# EAGLE board shema.v5 (EAGLE 7.6.0)
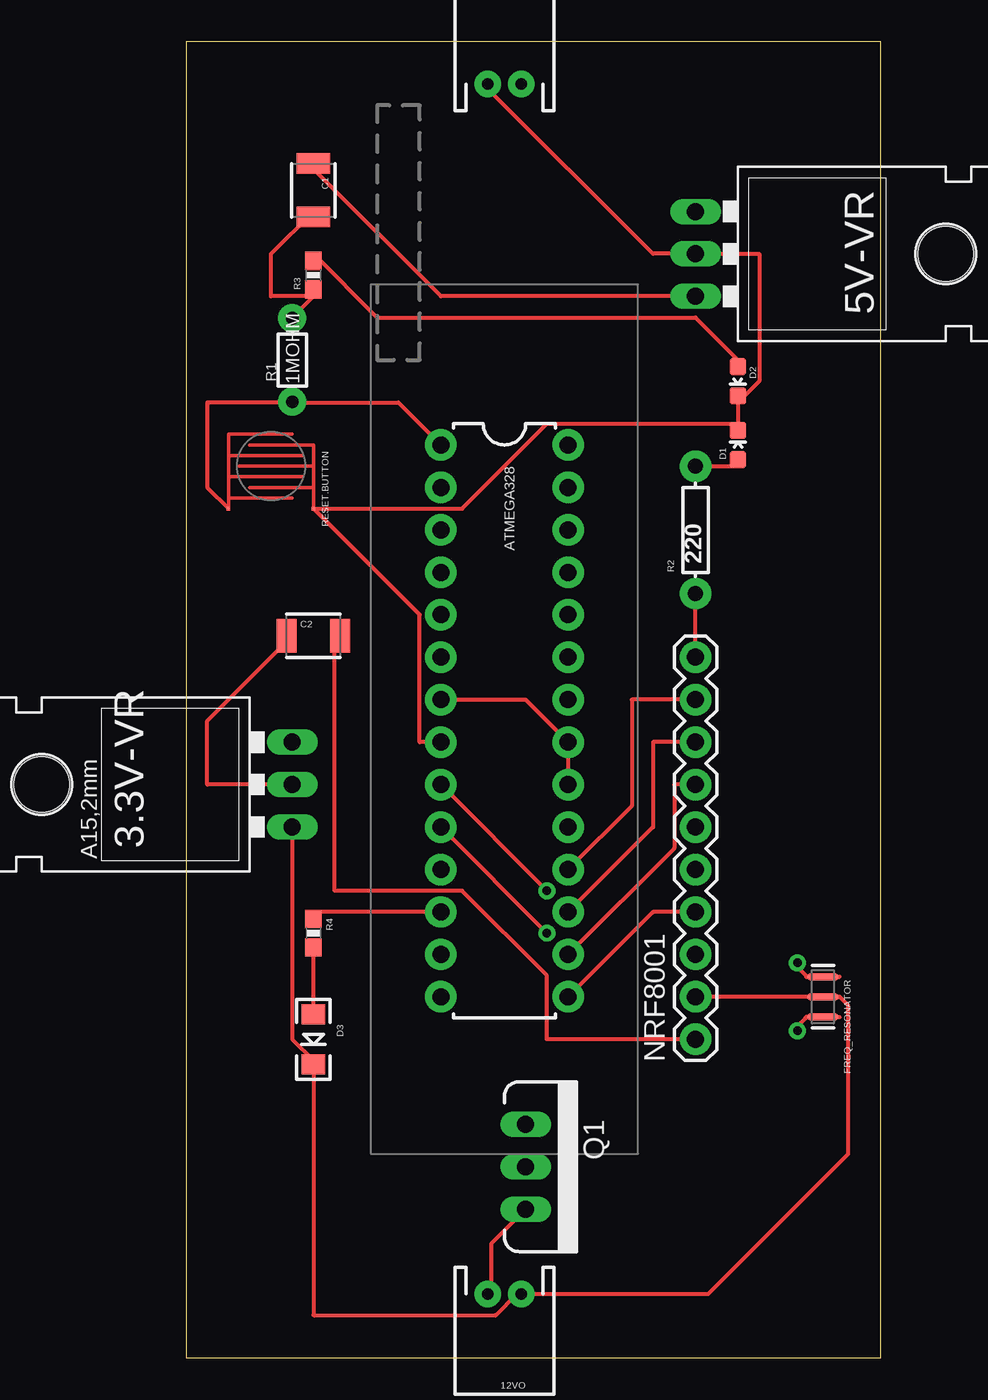
[diagram p0: board, top side]
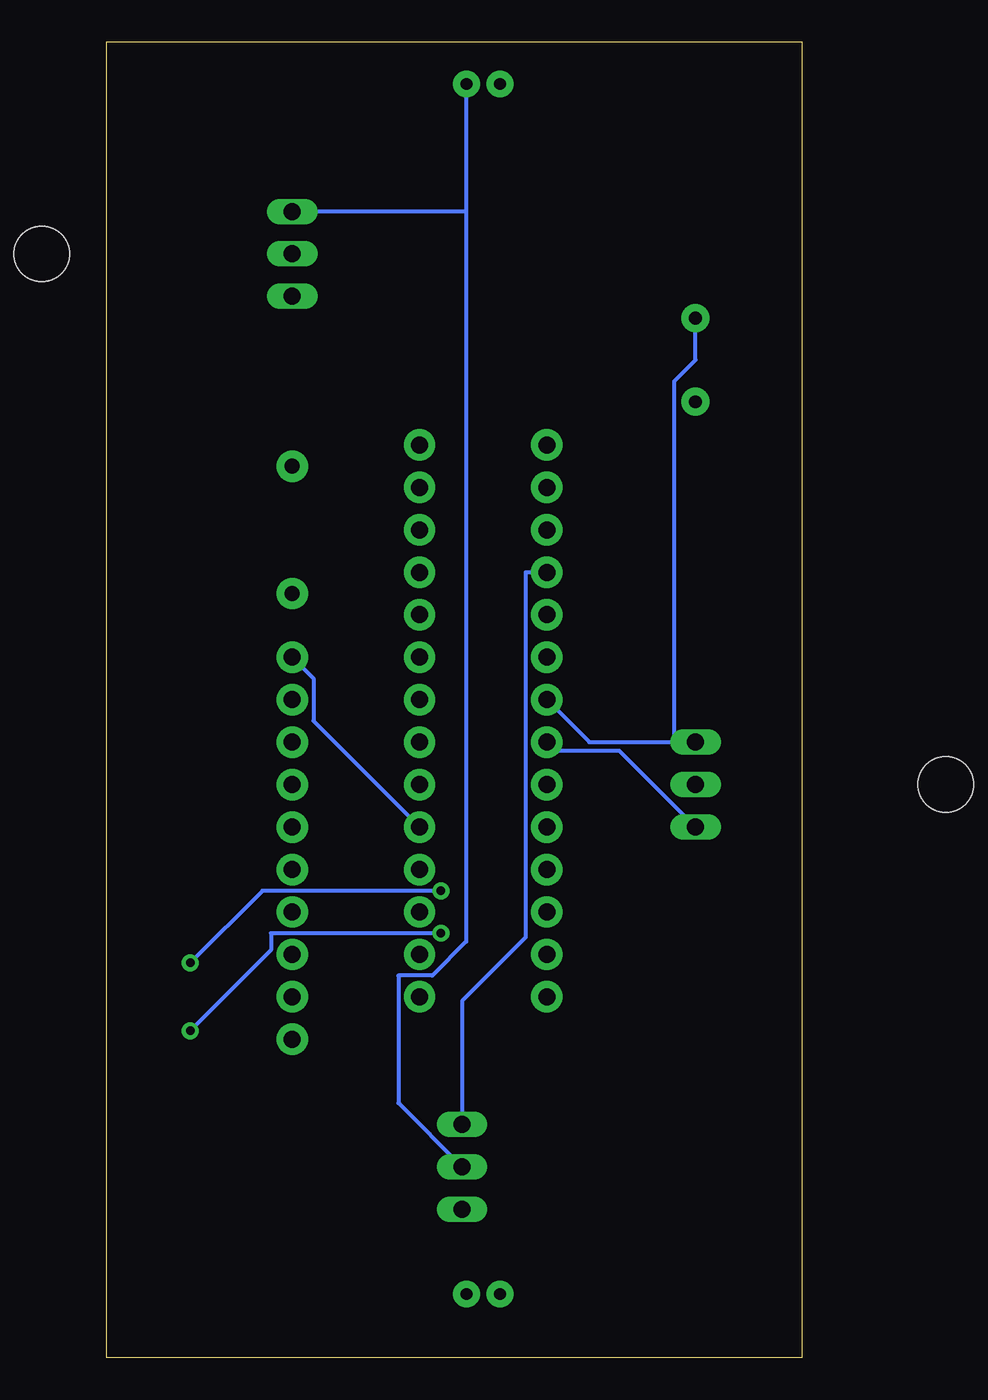
[diagram p1: board, bottom side, seen from below]

Size 41.58 x 78.73 mm. Coordinates in mm from the lower left corner, seen from the top.
Outline: 0,0 41.58,0 41.58,78.73 0,78.73 0,0
Copper layers (1*16): Top 0.035mm / dielectric 1.5mm / Bottom 0.035mm
Design rules "SparkFun-2-layer-STANDARD": minimum track width 10mil, minimum drill 20mil, track to track 10mil, track to pad 8mil, pad to pad 8mil, via to via 10mil, smd to smd 8mil, copper to edge 8mil, drill to drill 8mil, minimum pad ring 10mil, minimum via ring 10mil, stop-mask expansion 4mil, vias tented up to drill 25mil, thermal gap 10mil

## Footprints (pad centres in the part's own frame; a part is rotated, then mirrored left to right if it is on the bottom)
78XXL = drill 1.016 long: GND 0,-3.81; IN -2.54,-3.81; OUT 2.54,-3.81 | hole 3.302: 0,11.176
TO-220-ALT = drill 1.016 long: GND 0,-3.81; IN -2.54,-3.81; OUT 2.54,-3.81 | hole 3.302: 0,11.176
JST-2-PTH = drill 0.7 pad 1.6: 1 -1,0; 2 1,0
DIL28-3-ZIF_SOCKET = drill 1.016 pad 1.88: 1 -16.51,-3.81; 2 -13.97,-3.81; 3 -11.43,-3.81; 4 -8.89,-3.81; 5 -6.35,-3.81; 6 -3.81,-3.81; 7 -1.27,-3.81; 8 1.27,-3.81; 9 3.81,-3.81; 10 6.35,-3.81; 11 8.89,-3.81; 12 11.43,-3.81; 13 13.97,-3.81; 14 16.51,-3.81; 15 16.51,3.81; 16 13.97,3.81; 17 11.43,3.81; 18 8.89,3.81; 19 6.35,3.81; 20 3.81,3.81; 21 1.27,3.81; 22 -1.27,3.81; 23 -3.81,3.81; 24 -6.35,3.81; 25 -8.89,3.81; 26 -11.43,3.81; 27 -13.97,3.81; 28 -16.51,3.81
1210 = smd 1.2 x 2: 1 -1.6,0; 2 1.6,0
LED-0603 = smd 1 x 1: A 0,-0.877; C 0,0.877
LED-1206 = smd 1.2 x 1.4: A -1.5,0; C 1.5,0
RESONATOR-SMD = smd 0.45 x 1.905: 1 -1.2,0; 2 0,0; 3 1.2,0
1X10 = drill 1.016 pad 1.88: 1 0,0; 2 2.54,0; 3 5.08,0; 4 7.62,0; 5 10.16,0; 6 12.7,0; 7 15.24,0; 8 17.78,0; 9 20.32,0; 10 22.86,0
TO220V = drill 1.016 long: 1 -2.54,0; 2 0,0; 3 2.54,0
1/6W-RES = drill 0.762 pad 1.676: 1 -2.5,0; 2 2.5,0
AXIAL-0.3EZ = drill 0.9 pad 1.88: P$1 -3.81,0; P$2 3.81,0
0603-RES = smd 1.1 x 1: 1 -0.85,0; 2 0.85,0
BUTTON-CONDUCTIVE = smd 0.203 x 0.203: 1 2.54,2.54; 2 2.54,-2.54

## Placement (x,y rotation side)
3.3V-VR  V_REG_LD1117VXX  [78XXL]  2.54,34.29 90 top
5V-VR  5V  [TO-220-ALT]  34.29,66.04 270 top
12VIN  12V  [JST-2-PTH]  19.05,76.2 0 top
12VO  12V  [JST-2-PTH]  19.05,3.81 180 top
ATMEGA328  ZIFSOCKET-28-3ZIFFSOCKET-28-3  [DIL28-3-ZIF_SOCKET]  19.05,38.1 270 top
C1  22uF  [1210]  7.62,69.85 270 top
C2  22uF  [1210]  7.62,43.18 0 top
D1  Yellow  [LED-0603]  33.02,54.61 0 top
D2  RED  [LED-0603]  33.02,58.42 180 top
D3  GREEN  [LED-1206]  7.62,19.05 270 top
FREQ_RESONATOR  16MHZ  [RESONATOR-SMD]  38.1,21.59 270 top
NRF8001  3.3V  [1X10]  30.48,19.05 90 top
Q1  MOSFET-PCHANNELNDP6020P_20V_24A_LOW_VGS_TH  [TO220V]  20.32,11.43 270 top
R1  1MOHM  [1/6W-RES]  6.35,59.69 90 top
R2  220  [AXIAL-0.3EZ]  30.48,49.53 90 top
R3  200  [0603-RES]  7.62,64.77 90 top
R4  200  [0603-RES]  7.62,25.4 270 top
RESET.BUTTON  BUTTON-CONDUCTIVESMD  [BUTTON-CONDUCTIVE]  5.08,53.34 270 top

## Library data of the parts
3.3V-VR = SparkFun-PowerIC
5V-VR = SparkFun-PowerIC; PROD_ID: VREG-08450; SF_ID: COM-00107
12VIN 12VO = SparkFun-Connectors; PROD_ID: CONN-09863; SKU: PRT-09914
ATMEGA328 = SparkFun-Connectors
C1 C2 = SparkFun-Capacitors; PROD_ID: CAP-10381
D1 = SparkFun-LED; PROD_ID: DIO-09003
D2 = SparkFun-LED; PROD_ID: DIO-00819
D3 = SparkFun-LED; PROD_ID: DIO-00862
FREQ_RESONATOR = SparkFun-FreqCtrl; PROD_ID: XTAL-08900
NRF8001 = SparkFun-Connectors; PROD_ID: CONN-11563
Q1 = SparkFun-DiscreteSemi; PROD_ID: TRANS-13060
R1 = SparkFun-Resistors
R2 = SparkFun-Resistors; PROD_ID: RES-12181
R3 R4 = SparkFun-Resistors; PROD_ID: RES-08220
RESET.BUTTON = SparkFun-Electromechanical

## Nets
3.3VIN: C2.2 NRF8001.1
5VIN: 3.3V-VR.OUT ATMEGA328.7 ATMEGA328.20 ATMEGA328.21 C1.2 R1.2 R3.1
12VIN: 5V-VR.IN 12VIN.2 Q1.2
ARDUINO.D3: ATMEGA328.4 Q1.1
GND: 3.3V-VR.IN 5V-VR.GND 12VIN.1 12VO.1 ATMEGA328.8 D1.C D2.C D3.C FREQ_RESONATOR.2 NRF8001.2 RESET.BUTTON.1
MISO: ATMEGA328.18 NRF8001.9
MOSI: ATMEGA328.17 NRF8001.8
N$1: ATMEGA328.9 FREQ_RESONATOR.1
N$2: ATMEGA328.10 FREQ_RESONATOR.3
N$3: ATMEGA328.1 R1.1 RESET.BUTTON.2
N$4: 12VO.2 Q1.3
N$5: 5V-VR.OUT C1.1
N$6: 3.3V-VR.GND C2.1
N$7: D1.A R2.P$2
N$8: D2.A R3.2
N$9: ATMEGA328.22
N$10: D3.A R4.2
PD6: ATMEGA328.12 R4.1
RDY: NRF8001.6
REQ: ATMEGA328.16 NRF8001.7
RST: ATMEGA328.15 NRF8001.4
SCK: ATMEGA328.19 NRF8001.10 R2.P$1

## Tracks (layer width: path | path; a pad name or v marks a point on that pad's centre or on a via)
3.3VIN
  Top 0.254: NRF8001.1 21.59,19.05 21.59,22.86 16.51,27.94 8.89,27.94 8.89,43.18 C2.2
5VIN
  Top 0.254: 7.62,63.5 6.35,62.23 R1.2 | 7.62,63.5 5.08,63.5 5.08,66.04 7.62,68.58 C1.2 | 7.62,63.5 R3.1 | ATMEGA328.20 ATMEGA328.21 20.32,39.37 ATMEGA328.7
  Bottom 0.254: 7.62,36.83 12.7,36.83 ATMEGA328.7 | 7.62,36.83 7.62,58.42 6.35,59.69 R1.2 6.35,62.23 | 7.62,36.83 3.3V-VR.OUT
12VIN
  Bottom 0.254: Q1.2 24.13,15.24 24.13,22.86 22.1,22.86 20.07,24.89 20.07,68.58 | 20.07,68.58 20.07,76.2 12VIN.2 | 20.07,68.58 5V-VR.IN
ARDUINO.D3
  Bottom 0.254: Q1.1 20.32,21.34 16.51,25.15 16.51,46.99 ATMEGA328.4
GND
  Top 0.254: 33.02,57.15 33.02,55.88 | 33.02,57.15 34.29,58.42 34.29,66.04 5V-VR.GND 27.94,66.04 17.78,76.2 12VIN.1 | 33.02,57.15 D2.C | 3.3V-VR.IN 6.35,19.05 7.62,17.78 D3.C 7.62,2.54 18.54,2.54 19.81,3.81 12VO.1 31.24,3.81 39.62,12.19 39.62,21.08 39.12,21.59 FREQ_RESONATOR.2 | ATMEGA328.8 13.97,36.83 13.97,44.45 RESET.BUTTON.1 16.51,50.8 21.59,55.88 33.02,55.88 | 33.02,55.88 D1.C | 37.08,21.59 NRF8001.2
  Bottom 0.254: 3.3V-VR.IN 10.92,36.32 14.73,36.32 ATMEGA328.8
MISO
  Top 0.254: ATMEGA328.18 26.67,33.02 26.67,39.37 NRF8001.9
MOSI
  Top 0.254: ATMEGA328.17 27.94,31.75 27.94,36.83 NRF8001.8
N$1  (via drill 0.51)
  Top 0.254: v36.58,23.62 36.58,23.37 37.08,22.86 37.08,22.79 | ATMEGA328.9 v21.59,27.94
  Bottom 0.254: v36.58,23.62 32.26,27.94 v21.59,27.94
N$2  (via drill 0.51)
  Top 0.254: v36.58,19.56 36.58,19.81 37.08,20.32 37.08,20.39 | ATMEGA328.10 v21.59,25.4
  Bottom 0.254: v36.58,19.56 31.75,24.38 31.75,25.4 v21.59,25.4
N$3
  Top 0.254: RESET.BUTTON.2 1.27,52.07 1.27,57.15 6.35,57.15 | ATMEGA328.1 12.7,57.15 6.35,57.15 | 6.35,57.15 R1.1
N$4
  Top 0.254: Q1.3 18.29,6.86 18.29,3.81 12VO.2
N$5
  Top 0.254: 5V-VR.OUT 15.24,63.5 7.62,71.12 C1.1
N$6
  Top 0.254: 3.3V-VR.GND 1.27,34.29 1.27,38.1 6.35,43.18 C2.1
N$7
  Top 0.254: R2.P$2 33.02,53.34 D1.A
N$8
  Top 0.254: D2.A 33.02,59.69 30.48,62.23 11.43,62.23 7.62,66.04 R3.2
N$10
  Top 0.254: R4.2 D3.A 7.62,20.32
PD6
  Top 0.254: ATMEGA328.12 7.62,26.67 R4.1
REQ
  Top 0.254: ATMEGA328.16 29.21,30.48 29.21,34.29 NRF8001.7
RST
  Top 0.254: ATMEGA328.15 27.94,26.67 NRF8001.4
SCK
  Top 0.254: NRF8001.10 R2.P$1
  Bottom 0.254: ATMEGA328.19 29.21,38.1 29.21,40.64 NRF8001.10